# EAGLE board zeta2rework_lw_v19 (EAGLE 9.0.1)
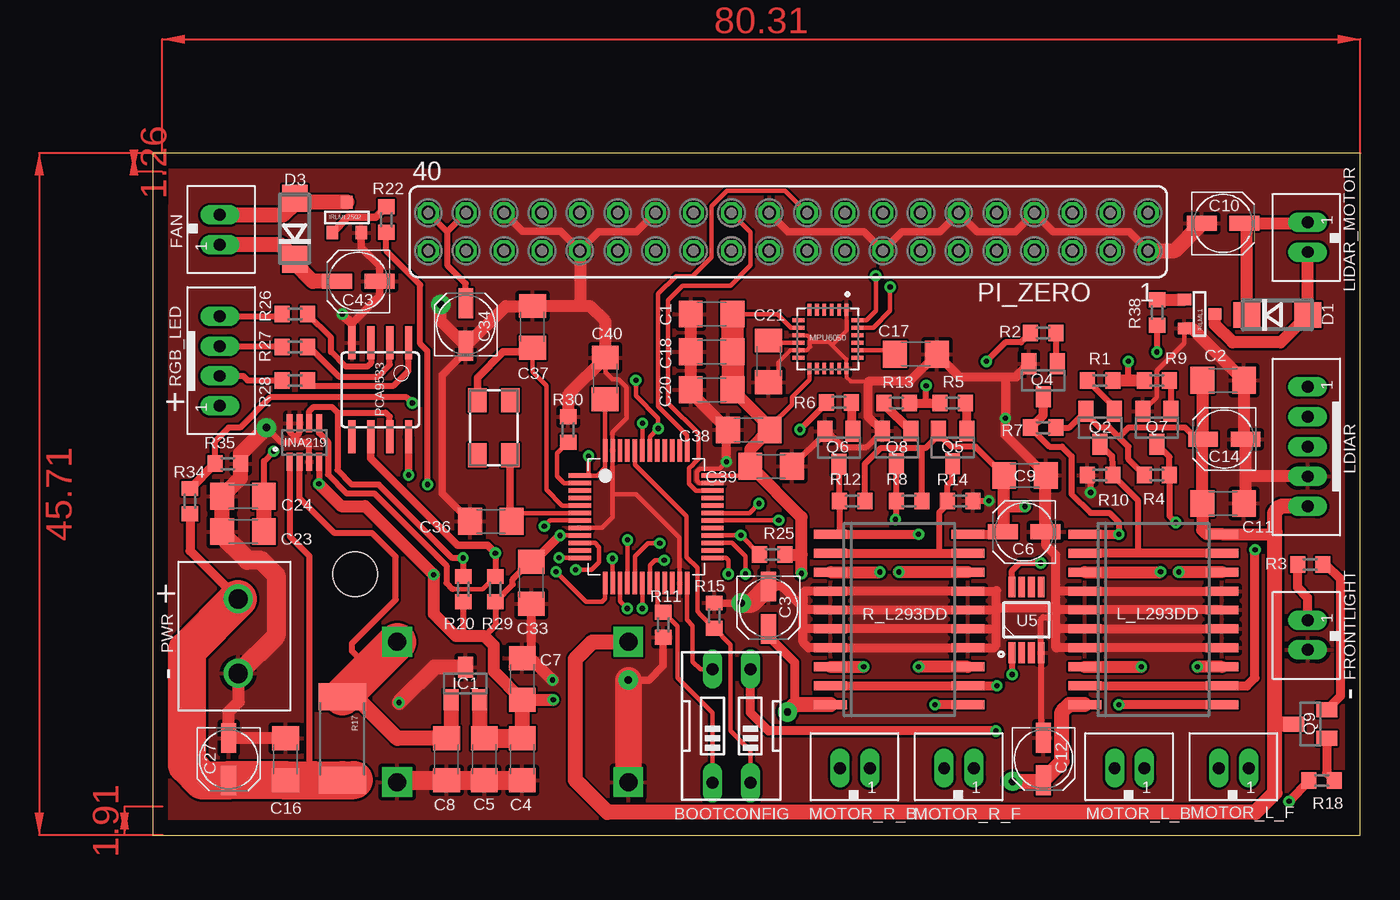
[diagram p0: board, top side]
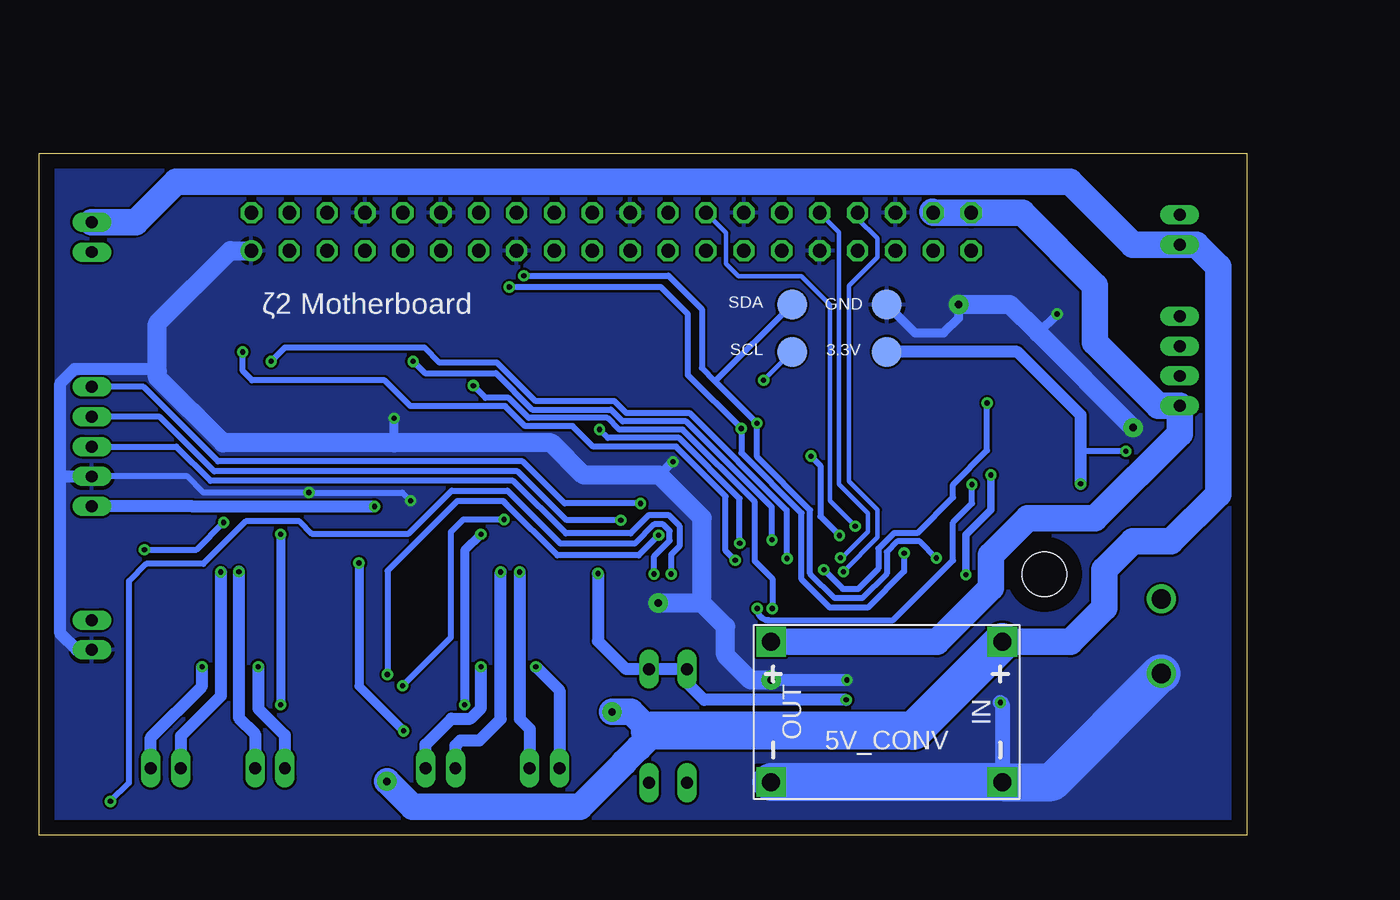
[diagram p1: board, bottom side, seen from below]

Size 80.95 x 45.71 mm. Coordinates in mm from the lower left corner, seen from the top.
Outline: 0,0 80.95,0 80.95,45.71 0,45.71 0,0
Copper layers (1*16): Top 0.035mm / dielectric 1.5mm / Bottom 0.035mm
Design rules "default": minimum track width 6mil, minimum drill 0.35mm, track to track 6mil, track to pad 6mil, pad to pad 6mil, via to via 6mil, smd to smd 6mil, copper to edge 40mil, drill to drill 6mil, minimum pad ring 10mil, minimum via ring 8mil, stop-mask expansion 4mil, vias tented up to drill 0mil, thermal gap 10mil
Holes 3 mm at 13.56,17.48

## Footprints (pad centres in the part's own frame; a part is rotated, then mirrored left to right if it is on the bottom)
TP20R = smd 2 x 2: TP 0,0
DC-DC-STEP-DOWN-MP2307 = drill 1.2 pad 2 square: IN+ -7.747,-4.699; IN- -7.747,4.699; OUT+ 7.747,-4.699; OUT- 7.747,4.699
EDG-02 = drill 0.813 long: 1 -1.27,-3.81; 2 1.27,-3.81; 3 1.27,3.81; 4 -1.27,3.81
C1206 = smd 1.6 x 1.8: 1 -1.4,0; 2 1.4,0
UD-4X5,8_NICHICON = smd 2 x 1: + 1.425,0; - -1.425,0
DO214AC = smd 1.8 x 1.7: A 2.05,0; C -2.05,0
JST_B2B-PH_HEADER = drill 0.8 long: P1 1.075,0.048; P2 -0.925,0.048
SOT23 = smd 1 x 1.4: 1 -0.95,-1.1; 2 0.95,-1.1; 3 0,1.1
SOT23-8 = smd 0.4 x 1.2: 1 -0.975,-1.3; 2 -0.325,-1.3; 3 0.325,-1.3; 4 0.975,-1.3; 5 0.975,1.3; 6 0.325,1.3; 7 -0.325,1.3; 8 -0.975,1.3
SOT-23 = smd 0.787 x 0.889: 1 0.025,-1.016; 2 -0.94,1.016; 3 0.991,1.016
5.0X3.2_KX-9A = smd 1.6 x 1.25: 1 -1.85,-1.1; 2 1.85,-1.1; 3 1.85,1.1; 4 -1.85,1.1
SO20 = smd 0.6 x 2.2: 1 -5.715,-4.6; 2 -4.445,-4.6; 3 -3.175,-4.6; 4 -1.905,-4.6; 5 -0.635,-4.6; 6 0.635,-4.6; 7 1.905,-4.6; 8 3.175,-4.6; 9 4.445,-4.6; 10 5.715,-4.6; 11 5.715,4.6; 12 4.445,4.6; 13 3.175,4.6; 14 1.905,4.6; 15 0.635,4.6; 16 -0.635,4.6; 17 -1.905,4.6; 18 -3.175,4.6; 19 -4.445,4.6; 20 -5.715,4.6
JST_B5B-PH_HEADER = drill 0.8 long: P1 4,0.048; P2 2,0.048; P3 0,0.048; P4 -2,0.048; P5 -4,0.048
QFN50P400X400X95-24N = smd 0.79 x 0.26: 1 -1.97,1.25; 2 -1.97,0.75; 3 -1.97,0.25; 4 -1.97,-0.25; 5 -1.97,-0.75; 6 -1.97,-1.25; 13 1.97,-1.25; 14 1.97,-0.75; 15 1.97,-0.25; 16 1.97,0.25; 17 1.97,0.75; 18 1.97,1.25 | smd 0.26 x 0.79: 7 -1.25,-1.97; 8 -0.75,-1.97; 9 -0.25,-1.97; 10 0.25,-1.97; 11 0.75,-1.97; 12 1.25,-1.97; 19 1.25,1.97; 20 0.75,1.97; 21 0.25,1.97; 22 -0.25,1.97; 23 -0.75,1.97; 24 -1.25,1.97
SOIC8 = smd 0.5 x 2.2: 1 -1.905,-3.154; 2 -0.645,-3.154; 3 0.625,-3.154; 4 1.895,-3.154; 5 1.905,3.154; 6 0.635,3.154; 7 -0.635,3.154; 8 -1.905,3.154
FE20-2 = drill 0.914: 1 -24.13,1.27 | drill 0.914 octagon: 2 -24.13,-1.27; 3 -21.59,1.27; 4 -21.59,-1.27; 5 -19.05,1.27; 6 -19.05,-1.27; 7 -16.51,1.27; 8 -16.51,-1.27; 9 -13.97,1.27; 10 -13.97,-1.27; 11 -11.43,1.27; 12 -11.43,-1.27; 13 -8.89,1.27; 14 -8.89,-1.27; 15 -6.35,1.27; 16 -6.35,-1.27; 17 -3.81,1.27; 18 -3.81,-1.27; 19 -1.27,1.27; 20 -1.27,-1.27; 21 1.27,1.27; 22 1.27,-1.27; 23 3.81,1.27; 24 3.81,-1.27; 25 6.35,1.27; 26 6.35,-1.27; 27 8.89,1.27; 28 8.89,-1.27; 29 11.43,1.27; 30 11.43,-1.27; 31 13.97,1.27; 32 13.97,-1.27; 33 16.51,1.27; 34 16.51,-1.27; 35 19.05,1.27; 36 19.05,-1.27; 37 21.59,1.27; 38 21.59,-1.27; 39 24.13,1.27; 40 24.13,-1.27
691137710002 = drill 1.3: 1 -2.5,0; 2 2.5,0
R0603 = smd 1 x 1.1: 1 -0.85,0; 2 0.85,0
2512 = smd 1.8 x 3.2: 1 -2.8,0; 2 2.8,0
JST_B4B-PH_HEADER = drill 0.8 long: P1 2.98,0.048; P2 0.98,0.048; P3 -1.02,0.048; P4 -3.02,0.048
LQFP48_7X7MM_0.5MMPP = smd 1.5 x 0.3: 1 -4.45,2.75; 2 -4.45,2.25; 3 -4.45,1.75; 4 -4.45,1.25; 5 -4.45,0.75; 6 -4.45,0.25; 7 -4.45,-0.25; 8 -4.45,-0.75; 9 -4.45,-1.25; 10 -4.45,-1.75; 11 -4.45,-2.25; 12 -4.45,-2.75; 25 4.45,-2.75; 26 4.45,-2.25; 27 4.45,-1.75; 28 4.45,-1.25; 29 4.45,-0.75; 30 4.45,-0.25; 31 4.45,0.25; 32 4.45,0.75; 33 4.45,1.25; 34 4.45,1.75; 35 4.45,2.25; 36 4.45,2.75 | smd 0.3 x 1.5: 13 -2.75,-4.45; 14 -2.25,-4.45; 15 -1.75,-4.45; 16 -1.25,-4.45; 17 -0.75,-4.45; 18 -0.25,-4.45; 19 0.25,-4.45; 20 0.75,-4.45; 21 1.25,-4.45; 22 1.75,-4.45; 23 2.25,-4.45; 24 2.75,-4.45; 37 2.75,4.45; 38 2.25,4.45; 39 1.75,4.45; 40 1.25,4.45; 41 0.75,4.45; 42 0.25,4.45; 43 -0.25,4.45; 44 -0.75,4.45; 45 -1.25,4.45; 46 -1.75,4.45; 47 -2.25,4.45; 48 -2.75,4.45
SOP65P490X95-8N = smd 1.4 x 0.45: 1 -2.2,0.975; 2 -2.2,0.325; 3 -2.2,-0.325; 4 -2.2,-0.975; 5 2.2,-0.975; 6 2.2,-0.325; 7 2.2,0.325; 8 2.2,0.975

## Placement (x,y rotation side)
3.3V  TPSQTP20R  [TP20R]  24.13,32.38 0 bottom
5V_CONV  DC-DC-STEP-DOWN-MP2307  [DC-DC-STEP-DOWN-MP2307]  24.13,8.25 180 bottom
BOOTCONFIG  [EDG-02]  38.79,7.32 0 top
C1  10µF  [C1206]  37.46,34.92 180 top
C2  0.1nF  [C1206]  71.76,30.48 0 top
C3  47µF  [UD-4X5,8_NICHICON]  41.27,15.24 270 top
C4  10µF  [C1206]  24.77,5.08 270 top
C5  0.1µF  [C1206]  22.23,5.08 270 top
C6  10µF  [UD-4X5,8_NICHICON]  58.42,20.32 180 top
C7  0.1µF  [C1206]  24.77,10.46 90 top
C8  4.7µF  [C1206]  19.69,5.08 270 top
C9  0.1nF  [C1206]  58.47,24.1 0 top
C10  47µF  [UD-4X5,8_NICHICON]  71.76,41 0 top
C11  0.1µF  [C1206]  71.76,22.23 0 top
C12  47µF  [UD-4X5,8_NICHICON]  59.72,5.11 270 top
C14  10µF  [UD-4X5,8_NICHICON]  71.83,26.54 180 top
C16  0.1µF  [C1206]  8.89,5.08 90 top
C17  2,2nF  [C1206]  51.16,32.23 0 top
C18  0.1µF  [C1206]  37.46,32.38 180 top
C20  0.1µF  [C1206]  37.46,29.84 180 top
C21  0.1µF  [C1206]  41.27,31.75 270 top
C23  10µF  [C1206]  6.05,20.35 180 top
C24  0.1µF  [C1206]  6.05,22.71 180 top
C27  47µF  [UD-4X5,8_NICHICON]  5.08,5.08 270 top
C33  10nF  [C1206]  25.37,16.92 270 top
C34  47µF  [UD-4X5,8_NICHICON]  20.98,34.21 90 top
C36  10µF  [C1206]  22.66,21.03 0 top
C37  10µF  [C1206]  25.45,34.06 270 top
C38  10nF  [C1206]  39.95,27.15 180 top
C39  10nF  [C1206]  41.45,24.71 0 top
C40  10nF  [C1206]  30.33,30.61 89.8 top
C43  47µF  [UD-4X5,8_NICHICON]  13.77,37.11 180 top
D1  1N4004 SMD  [DO214AC]  75.39,34.85 0 top
D3  1N4004 SMD  [DO214AC]  9.53,40.64 90 top
FAN  JST-PH_2-PIN_HEADER  [JST_B2B-PH_HEADER]  4.45,40.64 270 top
FRONTLIGHT  JST-PH_2-PIN_HEADER  [JST_B2B-PH_HEADER]  77.47,13.34 90 top
GND  TPSQTP20R  [TP20R]  24.13,35.56 0 bottom
IC1  MAX6520  [SOT23]  20.96,10.16 0 top
INA219  INA219  [SOT23-8]  10.16,26.31 0 top
IRLML1  [SOT-23]  70.18,34.9 90 top
IRLML2502  [SOT-23]  13.03,41.4 180 top
KX-9A  8Mhz  [5.0X3.2_KX-9A]  22.86,27.3 90 top
L_L293DD  L293DD  [SO20]  67.08,14.45 270 top
LDIAR  JST-PH_5-PIN_HEADER  [JST_B5B-PH_HEADER]  77.47,26.04 90 top
LIDAR_MOTOR  JST-PH_2-PIN_HEADER  [JST_B2B-PH_HEADER]  77.47,40.01 90 top
MOTOR_L_B  JST-PH_2-PIN_HEADER  [JST_B2B-PH_HEADER]  65.41,4.44 0 top
MOTOR_L_F  JST-PH_2-PIN_HEADER  [JST_B2B-PH_HEADER]  72.39,4.44 0 top
MOTOR_R_B  JST-PH_2-PIN_HEADER  [JST_B2B-PH_HEADER]  46.99,4.44 0 top
MOTOR_R_F  JST-PH_2-PIN_HEADER  [JST_B2B-PH_HEADER]  53.98,4.44 0 top
MPU6050  MPU-6050  [QFN50P400X400X95-24N]  45.26,33.25 270 top
PCA9533  PCA9533  [SOIC8]  15.24,29.84 180 top
PI_ZERO  [FE20-2]  42.6,40.44 180 top
PWR  691137710002  [691137710002]  5.71,13.34 270 top
Q2  [SOT23]  63.5,27.3 180 top
Q4  [SOT23]  59.69,30.48 180 top
Q5  [SOT23]  53.62,25.98 180 top
Q6  [SOT23]  46,25.96 180 top
Q7  [SOT23]  67.31,27.3 180 top
Q8  [SOT23]  49.86,25.98 180 top
Q9  [SOT23]  77.6,7.44 90 top
R1  500R  [R0603]  63.5,30.48 180 top
R2  500R  [R0603]  59.69,33.66 0 top
R3  220R  [R0603]  77.6,18.14 180 top
R4  100k  [R0603]  67.31,24.13 180 top
R5  500R  [R0603]  53.62,28.96 0 top
R6  500R  [R0603]  46,29.01 0 top
R7  100k  [R0603]  59.69,27.3 0 top
R8  100k  [R0603]  50.7,22.4 0 top
R9  500R  [R0603]  67.31,30.48 0 top
R10  100k  [R0603]  63.5,24.13 0 top
R11  132k  [R0603]  34.21,14.1 90 top
R12  100k  [R0603]  46.89,22.4 0 top
R13  500R  [R0603]  49.86,28.96 180 top
R14  100k  [R0603]  54.13,22.4 180 top
R15  132k  [R0603]  37.64,14.71 270 top
R17  0.1/1% (PT2512FK-070R1L)  [2512]  12.7,6.48 270 top
R18  500  [R0603]  78.36,3.66 0 top
R20  10k  [R0603]  20.8,16.48 90 top
R22  22R  [R0603]  15.65,41.25 90 top
R25  4k7  [R0603]  41.53,18.8 0 top
R26  220R  [R0603]  9.53,34.92 180 top
R27  220R  [R0603]  9.53,32.72 180 top
R28  220R  [R0603]  9.53,30.48 180 top
R29  10k  [R0603]  22.96,16.48 90 top
R30  100k  [R0603]  27.84,27.18 90 top
R34  100k  [R0603]  2.49,22.38 270 top
R35  69k  [R0603]  5.03,24.89 180 top
R38  22R  [R0603]  67.34,35.03 90 top
R_L293DD  L293DD  [SO20]  50.04,14.45 270 top
RGB_LED  JST-PH_4-PIN_HEADER  [JST_B4B-PH_HEADER]  4.45,31.75 270 top
SCL  TPSQTP20R  [TP20R]  30.48,32.38 0 bottom
SDA  TPSQTP20R  [TP20R]  30.48,35.56 0 bottom
STM32F103CB  STM32F103CB  [LQFP48_7X7MM_0.5MMPP]  33.07,21.34 0 top
U5  DS18B20U+  [SOP65P490X95-8N]  58.57,14.43 90 top

## Library data of the parts
3.3V GND SCL SDA = testpad
5V_CONV = diy-modules
BOOTCONFIG = special
C1-C12 C14 C16-C18 C20 C21 C23 C24 C27 C33 C34 C36-C40 C43 = rcl; SPICEPREFIX: C
D1 D3 = diode
FAN FRONTLIGHT LDIAR LIDAR_MOTOR MOTOR_L_B MOTOR_L_F MOTOR_R_B MOTOR_R_F RGB_LED = srg
IC1 = maxim; MF: MAXIM; MPN: MAX6520EUR-T; OC_FARNELL: unknown; OC_NEWARK: 02J4586
INA219 = INA219; AVAILABILITY: Unavailable; DESCRIPTION: the ina219 is a high-side current shunt and power monitor with an i2c interface. the ina219 monitors both shunt drop ...; MF: Texas Instruments; MP: INA219; PACKAGE: None; PRICE: None
IRLML1 IRLML2502 = zetex; OC_FARNELL: unknown; OC_NEWARK: unknown
KX-9A = crystal-geyer_V1_0
L_L293DD R_L293DD = st-microelectronics; OC_FARNELL: unknown
MPU6050 = MPU-6050; AVAILABILITY: Good; DESCRIPTION: 3-axis gyroscope, 3-axis accelerometer in a 4x4x0.9 housing; MF: TDK; MP: MPU-6050; PACKAGE: QFN-24 InvenSense; PRICE: 5.12 USD
PCA9533 = adam - ics
PI_ZERO = con-lsta; OC_FARNELL: unknown; OC_NEWARK: unknown
PWR = term block; AVAILABILITY: Unavailable; DESCRIPTION: Term Block 2pos Side Entry 5mm; MF: Wurth Electronics; MP: 691137710002; PACKAGE: None; PRICE: None
Q2 Q4-Q9 = semicon-smd-ipc
R1-R15 R18 R20 R22 R25-R30 R34 R35 R38 = rcl; SPICEPREFIX: R
R17 = microbuilder
STM32F103CB = STM32F103C8T6; AVAILABILITY: Good; DESCRIPTION: Mainstream Performance line, ARM Cortex-M3 MCU with 64 Kbytes Flash, 72 MHz CPU, motor control, USB and CAN; MF: STMicroelectronics; MP: STM32F103C8T6; PACKAGE: LQFP-48 STMicroelectronics; PRICE: 3.83 USD
U5 = DS18B20U_; AVAILABILITY: Unavailable; DESCRIPTION: Date Code: 1043+; RoHS Compliant: Yes;; MF: Maxim; MP: DS18B20U+; PACKAGE: TSSOP-8 Chip Coolers; PRICE: None

## Nets
+3V3: 3.3V.TP BOOTCONFIG.3 BOOTCONFIG.4 C1.1 C4.1 C5.1 C7.1 C18.1 C20.1 C23.1 C24.1 C33.1 C38.1 C39.1 C40.1 IC1.2 INA219.4 MPU6050.8 MPU6050.13 PCA9533.8 R20.1 R25.2 R29.1 STM32F103CB.1 STM32F103CB.9 STM32F103CB.24 STM32F103CB.36 STM32F103CB.48 U5.8
+5V: 5V_CONV.OUT+ C2.1 C6.+ C9.1 C11.1 C14.+ C34.+ L_L293DD.20 LDIAR.P5 PI_ZERO.38 PI_ZERO.40 Q2.2 Q5.2 Q9.3 R4.2 R7.2 R8.2 R12.2 R_L293DD.20 RGB_LED.P1
+8V: 5V_CONV.IN+ C3.+ C8.1 C10.+ C12.+ C43.+ D1.C D3.C FAN.P1 IC1.1 INA219.2 L_L293DD.10 LIDAR_MOTOR.P1 R17.1 R_L293DD.10
BAT_LVL: R34.1 R35.2 STM32F103CB.10
BOOT0: BOOTCONFIG.2 R15.2 STM32F103CB.44
BOOT1: BOOTCONFIG.1 R11.2 STM32F103CB.20
BOOT2: PI_ZERO.29
BOOT3: PI_ZERO.27
FRONT_LIGHT: R18.1 STM32F103CB.27
GND: 5V_CONV.IN- 5V_CONV.OUT- C1.2 C2.2 C3.- C4.2 C5.2 C6.- C7.2 C8.2 C9.2 C10.- C11.2 C12.- C14.- C16.2 C17.2 C18.2 C20.2 C21.2 C23.2 C24.2 C27.- C33.2 C34.- C36.1 C37.1 C38.2 C39.2 C40.2 C43.- FRONTLIGHT.P2 GND.TP IC1.3 INA219.3 INA219.7 INA219.8 IRLML1.2 IRLML2502.2 L_L293DD.4 L_L293DD.5 L_L293DD.6 L_L293DD.7 L_L293DD.14 L_L293DD.15 L_L293DD.16 L_L293DD.17 LDIAR.P4 MPU6050.1 MPU6050.9 MPU6050.11 MPU6050.18 PCA9533.4 PI_ZERO.1 PI_ZERO.8 PI_ZERO.12 PI_ZERO.15 PI_ZERO.22 PI_ZERO.28 PI_ZERO.31 PI_ZERO.36 PWR.2 Q4.2 Q6.2 Q7.2 Q8.2 R10.1 R11.1 R14.1 R15.1 R30.2 R35.1 R_L293DD.4 R_L293DD.5 R_L293DD.6 R_L293DD.7 R_L293DD.14 R_L293DD.15 R_L293DD.16 R_L293DD.17 STM32F103CB.8 STM32F103CB.23 STM32F103CB.35 STM32F103CB.47 U5.4
LIDAR_POS_INT: LDIAR.P3 STM32F103CB.25
M_DIR_1: R1.1 R9.1 STM32F103CB.14
M_DIR_2: R5.1 R13.1 STM32F103CB.15
MPU_INT: MPU6050.12
N$1: L_L293DD.9 L_L293DD.12 Q7.3 R4.1
N$2: MOTOR_R_F.P2 R_L293DD.18
N$3: MOTOR_R_F.P1 R_L293DD.13
N$4: L_L293DD.18 MOTOR_L_F.P2
N$5: L_L293DD.2 L_L293DD.19 Q2.3 R10.2
N$6: Q8.3 R8.1 R_L293DD.9 R_L293DD.12
N$7: Q5.3 R14.2 R_L293DD.2 R_L293DD.19
N$8: L_L293DD.1 L_L293DD.11 Q4.3 R7.1
N$9: Q6.3 R12.1 R_L293DD.1 R_L293DD.11
N$10: Q2.1 R1.2
N$11: Q4.1 R2.2
N$12: Q7.1 R9.2
N$13: Q5.1 R5.2
N$14: Q6.1 R6.2
N$15: Q8.1 R13.2
N$16: L_L293DD.13 MOTOR_L_F.P1
N$17: L_L293DD.8 MOTOR_L_B.P2
N$18: L_L293DD.3 MOTOR_L_B.P1
N$19: Q9.1 R18.2
N$20: Q9.2 R3.1
N$21: FRONTLIGHT.P1 R3.2
N$22: PCA9533.3 R26.1
N$23: PCA9533.2 R27.1
N$24: PCA9533.1 R28.1
N$25: MOTOR_R_B.P2 R_L293DD.8
N$26: MOTOR_R_B.P1 R_L293DD.3
N$31: R26.2 RGB_LED.P4
N$33: R27.2 RGB_LED.P3
N$34: C17.1 MPU6050.20
N$35: R28.2 RGB_LED.P2
N$36: C21.1 MPU6050.10
N$37: IRLML2502.3 R22.2
N$38: IRLML1.3 R38.2
N$39: D1.A IRLML1.1 LIDAR_MOTOR.P2
N$46: C36.2 KX-9A.1 STM32F103CB.6
N$47: C37.2 KX-9A.3 STM32F103CB.5
N$49: R30.1 STM32F103CB.2
N$55: D3.A FAN.P2 IRLML2502.1
NRST: PI_ZERO.26 STM32F103CB.7
PWM_FAN: R22.1 STM32F103CB.18
PWM_LIDAR: R38.1 STM32F103CB.19
PWM_M_EN_1: R2.1 STM32F103CB.16
PWM_M_EN_2: R6.1 STM32F103CB.17
SCL: INA219.5 MPU6050.23 PCA9533.6 R29.2 SCL.TP STM32F103CB.42
SDA: INA219.6 MPU6050.24 PCA9533.7 R20.2 SDA.TP STM32F103CB.43
SWCLK: PI_ZERO.20 STM32F103CB.37
SWDIO: PI_ZERO.24 STM32F103CB.34
TEMPERATURE: R25.1 STM32F103CB.28 U5.1
U1_RX: LDIAR.P1 STM32F103CB.31
U1_TX: LDIAR.P2 STM32F103CB.30
USART2_RX: PI_ZERO.34 STM32F103CB.13
USART2_TX: PI_ZERO.32 STM32F103CB.12
USB_DM: STM32F103CB.32
USB_DP: STM32F103CB.33
V+: C16.1 C27.+ INA219.1 PWR.1 R17.2 R34.2

## Tracks (layer width: path | path; a pad name or v marks a point on that pad's centre or on a via)
+3V3  (via drill 0.35)
  Top 0.305: MPU6050.8 42.79,34 41.86,34.92 C1.1 | STM32F103CB.1 29.21,24.09 | 29.21,24.09 29.8,24.09 30.32,24.61 STM32F103CB.48 C40.1 | STM32F103CB.36 39.42,24.09 C39.1 | MPU6050.13 44.01,30.52 42.85,29.36 42.85,28.85 41.35,27.36 C38.1 | STM32F103CB.9 v27.31,20.09 | v29.21,25.4 29.21,24.09 | STM32F103CB.24 35.82,14.42 36.2,14.05 36.2,11.63 36.7,11.12 BOOTCONFIG.4
  Top 0.406: U5.8 57.6,17.72 58.11,18.24 v59.51,18.24 | 25.13,17.84 C33.1 | 25.76,18.32 C33.1 | R20.1 20.8,13.49 20.96,13.34 | 22.23,13.34 22.96,14.07 R29.1 24.13,16.8 24.13,17.14 25.3,18.32 C33.1 | 25.43,18.32 C33.1 | 27.14,20.09 v27.31,20.09 | INA219.4 11.13,23.56 v11.12,23.55 | C24.1 7.44,25.07 v8.1,25.73
  Top 0.508: PCA9533.8 v17.15,24.13 | 11.13,23.48 11.13,23.56
  Top 0.61: BOOTCONFIG.3 40.06,8.2 41.27,6.99 v56.52,6.99 | v27.31,20.09 25.54,18.32 C33.1
  Top 0.813: C7.1 24.36,8.66 | C7.1 22.86,10.97 22.86,12.7 22.23,13.34 20.96,13.34 20.32,13.34 18.82,14.83 v18.82,17.45 14.22,22.05 12.62,22.05 v11.12,23.55 | C20.1 41.35,27.36 C38.1 40.05,25.85 C39.1 40.09,24.71 43.48,21.32 43.48,18.8 | v43.48,17.53 43.48,18.8 | R25.2 43.48,18.8 | C7.1 v26.85,9.07
  Top 1.016: IC1.2 21.91,6.8 C5.1 | C7.1 C4.1 | C23.1 C24.1
  Top 1.27: C5.1 C4.1
  Top 1.524: C20.1 38.89,30.96 C18.1 C1.1
  Bottom 0.406: v27.31,20.09 28.58,21.36 28.58,24.77 v29.21,25.4 | v8.1,25.73 10.82,25.73 11.12,26.04
  Bottom 0.508: v17.15,24.13 17.15,21.79 18.82,20.12 v18.82,17.45 | v11.12,23.55 11.15,23.57
  Bottom 0.61: v59.51,18.24 59.51,9.98 v56.52,6.99 | BOOTCONFIG.4 37.52,11.23
  Bottom 0.813: v43.48,17.53 43.48,13 41.6,11.12 BOOTCONFIG.3 BOOTCONFIG.4 37.52,10.21 36.37,9.07 v26.85,9.07 | 3.3V.TP 15.37,32.38 11.12,28.14 11.12,26.04 v11.12,23.55
+5V  (via drill 0.35)
  Top 0.305: 52.67,26.81 52.67,26.88
  Top 0.406: R12.2 47.74,24.88 48.82,25.96 51.43,25.96 | 52.67,26.81 51.82,25.96 51.43,25.96 | R8.2 51.55,25.84 51.43,25.96 | 18.47,41.61 PI_ZERO.40 19.74,40.44 | R4.2 65.41,25.19 65.41,26.04 64.77,26.67 | 64.77,26.67 64.14,27.3 63.5,27.3 62.55,28.26 Q2.2 61.45,27.3 R7.2 | 64.77,26.67 65.41,27.3 69.22,27.3 69.98,26.54 C14.+ | Q5.2 52.67,26.88 53.52,26.03 55.15,26.03 C9.1 | C34.+ 20.98,36.96 19.74,38.2 19.74,40.44 | PI_ZERO.38 19.74,40.44
  Top 0.61: R_L293DD.20 56.84,20.17 C6.+
  Top 0.813: C6.+ 57.07,20.4 57.07,22.23 | 57.07,22.23 C9.1 | C2.1 70.41,30.43 C14.+ 70.36,26.49 C11.1 70.36,20.45 70.64,20.17 L_L293DD.20 75.08,20.17 75.23,20.32 | v58.47,22.02 57.27,22.02 57.07,22.23
  Top 1.016: LDIAR.P5 75.6,22.04 75.23,21.66 75.23,20.32 75.23,7.62 | 5V_CONV.OUT+ 29.46,12.95 28.32,11.81 28.32,3.68 30.48,1.52 73.91,1.52 75.23,2.84 75.23,7.62 | Q9.3 75.41,7.44 75.23,7.62
  Bottom 0.813: v58.48,22.04 v58.47,22.02 70.66,22.02 70.68,22.04 LDIAR.P5
  Bottom 1.778: 21.08,41.78 PI_ZERO.38 PI_ZERO.40 15.04,41.71 10.16,36.83 10.16,33.02 5.91,28.77 RGB_LED.P1 4.49,26.9 10.16,21.23 14.67,21.23 17.15,18.76 17.15,16.59 20.78,12.95 5V_CONV.OUT+
+8V  (via drill 0.5 pad 1.3)
  Top 0.406: R17.1 12.31,8.89 11.43,8.89 11.48,8.94 | INA219.2 9.83,22.58 12.17,20.25 14.69,20.25 16.28,18.65 16.28,15.78 13.33,12.83 13.33,12.34 14.09,11.59 14.09,10.67
  Top 0.61: C3.+ 41.27,13.34 43.03,11.58 43.03,8.74
  Top 0.813: LIDAR_MOTOR.P1 77.34,41 C10.+ 73.34,40.84 D1.C
  Top 1.016: C43.+ 10.73,37.11 9.53,38.31 D3.C 8.58,39.56 FAN.P1 | IC1.1 20.01,6.8 C8.1 16.38,6.48 13.58,9.28 R17.1 | 59.71,3.2 C12.+ | v57.63,3.61 59.64,3.61 C12.+ | R_L293DD.10 43.03,8.74 v42.54,8.25 | L_L293DD.10 61.44,8.74 60.96,8.25 60.96,4.92 C12.+
  Top 2.54: R17.1 14.09,10.67 5V_CONV.IN+
  Bottom 1.778: v42.54,8.25 41.27,8.25 40,6.99 40,6.6 40.74,5.87 40.76,5.87 41.76,4.87 41.76,4.85 44.7,1.91 55.93,1.91 v57.63,3.61 | LIDAR_MOTOR.P1 74.49,41.08 71.77,43.8 11.86,43.8 7.62,39.56 FAN.P1 3.37,39.56 1.91,38.1 1.91,22.86 5.08,19.69 7.62,19.69 9.53,17.78 9.53,15.24 11.81,12.95 5V_CONV.IN+
  Bottom 2.54: 5V_CONV.IN+ 22.35,6.99 40,6.99
BAT_LVL  (via drill 0.35)
  Top 0.305: STM32F103CB.10 29.64,19.59 29.92,19.3 29.92,18.29 29.41,17.78 v28.35,17.78
  Top 0.406: v17.4,28.96 17.02,29.34 7.87,29.34 5.84,27.3 5.08,27.3 4.15,26.38 4.15,24.89
  Top 0.61: R34.1 4.15,24.89 R35.2
  Bottom 0.406: v28.35,17.78 27.08,16.51 26.04,16.51 24.69,17.86 24.69,19.2 23.64,20.24 22.07,20.24 19.69,22.63 19.69,23.5 17.4,25.78 v17.4,28.96
BOOT0
  Top 0.305: STM32F103CB.44 32.32,24.83 34.47,22.68 34.48,22.68 35.78,21.38 35.78,18.63 36.5,17.91 36.5,16.89 36.5,16.51 36.5,15 36.73,14.77 36.86,14.64 R15.2 38.73,12.76 38.73,6.99 40.06,5.66 BOOTCONFIG.2
BOOT1
  Top 0.305: 37.52,4.02 BOOTCONFIG.1 37.52,8.2 35.18,10.54 35.18,12.7 35.18,12.83 35.18,13.98 R11.2 33.82,14.71 STM32F103CB.20
FRONT_LIGHT  (via drill 0.35)
  Top 0.305: v39.73,17.5 39.73,18.69 38.83,19.59 STM32F103CB.27
  Top 0.61: R18.1 77.51,3.59 v76.18,2.26
  Bottom 0.406: v39.73,17.5 39.73,18.69 38.69,19.73 38.69,20.39 39.12,20.82 39.73,20.82 41.02,19.53 46,19.53 49.55,23.09 53.29,23.09 56.17,20.21 62.67,20.21 63.5,21.03 67.11,21.03 69.95,18.19 73.76,18.19 74.93,17.02 74.93,3.5 v76.18,2.26
GND  (via drill 0.35, 0.5 pad 1.3)
  Top 0.254: MPU6050.9 43.87,33.5 44.07,33.3 44.07,33.02 | 44.07,33.02 44.07,32.72 43.85,32.5 MPU6050.11 42.73,32.5 41.91,31.67 41.91,30.48 41.78,30.35 C21.2 | 47.98,30.4 46.79,30.4 46.51,30.68 MPU6050.18 46.51,31.87 45.54,32.84 | 50.73,30.4 50.8,30.48 | 44.07,33.02 45.36,33.02 45.54,32.84 | MPU6050.1 46.51,33.81 45.54,32.84
  Top 0.305: Q7.2 67.31,29.36 67.31,31.12 69.16,32.97 IRLML1.2 | 30.82,22.86 STM32F103CB.47 30.82,27.01 31.75,27.94 31.75,30.02 31.22,30.56 30.81,30.56 30.33,31.03 C40.2 | STM32F103CB.23 35.32,19.92 32.38,22.86 30.82,22.86 | STM32F103CB.8 30.11,20.59 30.82,21.3 30.82,22.86 | STM32F103CB.35 36.66,23.59 36.47,23.78 36.47,24.36 36.67,24.56 38,24.56 v38.46,25.02
  Top 0.406: Q8.2 47.83,26 46.3,26 45.25,27.06 Q6.2 45.05,26.91 C39.2 | INA219.8 9.19,27.01 9.53,26.67 | 9.53,26.67 9.83,26.98 INA219.7 | 7.56,27.24 v7.62,27.3 | R10.1 62.86,23.91 v62.86,22.96 | R14.1 v56.06,22.4 | 59.55,6.7 U5.4 59.55,14.46 59.69,14.61 60.53,14.61 | 9.53,26.67 9.2,26.34 8.59,26.34 v7.62,27.3 | 9.53,26.67 9.88,26.31 10.39,26.31 10.48,26.22 INA219.3 | 7.62,27.13 v7.62,27.3
  Top 0.508: PI_ZERO.1 65.46,40.44 60.38,40.44 PI_ZERO.8 57.84,40.44 55.3,40.44 PI_ZERO.12 52.76,40.44 50.22,40.44 PI_ZERO.15 47.68,40.44 42.6,40.44 PI_ZERO.22 | PI_ZERO.28 32.44,40.44 29.9,40.44 PI_ZERO.31 27.33,40.46 24.79,40.46 PI_ZERO.36 | C36.1 19.38,22.91 19.38,30.81 20.98,32.41 C34.- | IRLML2502.2 13.97,39.37 15.19,38.15 C43.- 15.19,36.15 13.35,34.3 PCA9533.4 13.35,34.28 | 59.55,6.7 C12.- | R11.1 34.21,11.35 33.25,10.39 v31.88,10.39 | R15.1 v39.45,15.55 | 7.81,26.99 7.56,27.24
  Top 0.61: 57.15,30.71 v57.15,27.94 57.15,26.83 C9.2 | 50.8,30.48 C17.2 54.08,30.71 57.15,30.71 | 50.73,30.4 47.98,30.4 47.95,30.38 47.95,28.04 Q8.2 | v38.46,25.02 38.46,27.05 C38.2 | C7.2 25.38,12.47 C33.2 | C6.- 59.84,19.45 60.53,18.77 60.53,16.51 | 57.15,30.71 57.87,30.71 Q4.2 | L_L293DD.17 L_L293DD.4 60.68,16.36 60.53,16.51 | L_L293DD.16 L_L293DD.5 60.68,15.09 60.53,15.24 | L_L293DD.15 L_L293DD.6 60.68,13.82 60.53,13.97 | L_L293DD.14 L_L293DD.7 60.6,12.55 60.53,12.62 60.53,13.97 | v12.7,34.92 13.32,34.3 13.35,34.3 | 60.53,13.97 60.53,14.61 60.53,15.24 | 60.53,15.24 60.53,16.51 | 56.52,15.24 56.52,13.97 | 56.52,13.97 56.52,12.7 56.36,12.55 R_L293DD.14 R_L293DD.7 43.97,12.55 43.59,12.93 43.59,13.97 | 56.52,15.24 56.36,15.09 R_L293DD.16 R_L293DD.5 43.74,15.09 43.59,15.24 | 56.52,13.97 56.36,13.82 R_L293DD.15 R_L293DD.6 43.74,13.82 43.59,13.97 | 56.52,15.24 60.53,15.24 | 43.59,13.97 43.59,15.24 | 43.59,15.24 42.16,16.66 C3.- | 43.59,15.24 43.59,16.21 43.74,16.36 R_L293DD.4 R_L293DD.17 56.52,16.36 | 56.57,16.41 56.52,16.36 | 56.52,16.36 56.52,15.24
  Top 0.813: 73.26,24.13 C14.- 73.16,26.64 C2.2 69.68,33.96 IRLML1.2 | 73.26,24.13 73.26,22.33 C11.2 | LDIAR.P4 73.35,24.04 73.26,24.13 | C1.2 C18.2 C20.2 36.06,29.64 C38.2 | C6.- 59.84,24.08 C9.2 | R30.2 27.84,29.51 C40.2 30.33,34.44 29.31,35.46 28.58,35.46 | 28.58,35.46 C37.1 23.65,35.46 C34.- 19.3,34.47 v19.3,35.56 | PI_ZERO.31 28.63,35.51 28.58,35.46 | C7.2 25.32,11.87 v26.8,10.39 | 4.59,22.66 C24.2 | 5.75,10.84 5.75,8.93 5.08,8.25 C27.- 5.1,6.48 C16.2
  Top 1.016: PI_ZERO.1 68.5,39.17 C10.- | IC1.3 18.88,11.26 v16.51,8.89 | C23.2 C24.2 5.88,23.94 R35.1 5.88,25.56 v7.62,27.3
  Top 1.27: v39.45,15.55 40.16,15.55 C3.- | 5V_CONV.IN- 16.51,3.68 C8.2 C5.2 C4.2 | C23.2 4.59,20.17 6.35,18.41 7.26,18.41 8.26,17.42 8.26,13.34 5.75,10.84 PWR.2
  Top 1.778: 5V_CONV.OUT- v31.88,10.39
  Bottom 0.406: LDIAR.P4 71.03,24.04 69.95,22.96 v62.86,22.96 56.61,22.96 v56.06,22.4
  Bottom 0.61: 57.15,26.29 v57.15,27.94 | v38.46,25.02 38.48,25.02 39.37,24.13 | GND.TP 22.23,33.66 20.32,33.66 19.3,34.67 v19.3,35.56 | v12.7,34.92 13.97,33.66
  Bottom 0.813: v26.8,10.39 v31.88,10.39 | 73.03,31.12 73.16,31.25 78.58,31.25 79.53,30.3 79.53,24.13 | FRONTLIGHT.P2 78.45,12.41 79.53,13.49 79.53,24.13 | 79.53,24.13 79.43,24.04 LDIAR.P4
  Bottom 1.016: v16.51,8.89 16.38,8.76 5V_CONV.IN-
  Bottom 1.27: 36.5,15.55 v39.45,15.55 | v31.88,10.39 33.25,10.39 34.92,12.07 34.92,13.97 36.5,15.55 | 36.5,15.55 36.5,21.26 39.37,24.13 44.45,24.13 46.61,26.29 57.15,26.29 68.63,26.29 73.03,30.68 73.03,31.12 73.03,34.29 68.15,39.17 PI_ZERO.1 | v7.62,27.3 13.97,33.66 15.88,35.56 v19.3,35.56
  Bottom 2.54: 5V_CONV.OUT- 5V_CONV.IN- 13.06,3.56 5.78,10.84 PWR.2
  pour Top: -0.64,46.99 -0.64,-1.27 82.55,-1.27 82.55,46.99
  pour Bottom: 0,46.36 0,-0.64 81.92,-0.64 81.92,46.36
LIDAR_POS_INT  (via drill 0.35)
  Top 0.305: STM32F103CB.25 38.44,18.59 38.61,18.41 38.61,17.53 v38.58,17.5
  Bottom 0.406: v38.58,17.5 38.58,18.8 38.02,19.36 38.02,20.73 38.76,21.46 40.06,21.46 41.3,20.22 45.64,20.22 49.17,23.75 69.47,23.75 71.76,26.04 LDIAR.P3
M_DIR_1  (via drill 0.35)
  Top 0.305: STM32F103CB.14 30.82,18.53 v30.81,18.54
  Top 0.406: 65.41,30.48 v65.41,31.75
  Top 0.813: R1.1 65.41,30.48 R9.1
  Bottom 0.406: v30.81,18.54 30.84,18.57 30.84,21.78 37.35,28.3 41.6,28.3 42.39,29.08 47.67,29.08 50.26,31.67 54.13,31.67 55.12,32.66 64.49,32.66 v65.41,31.75
M_DIR_2  (via drill 0.35)
  Top 0.305: STM32F103CB.15 31.32,15.67 v31.8,15.19
  Top 0.406: 52.07,28.96 51.84,29.19 v51.84,30.12
  Top 0.61: R13.1 52.07,28.96 R5.1
  Bottom 0.406: v31.8,15.19 31.8,17.2 32.97,18.36 32.97,22.33 37.82,27.18 42.06,27.18 42.85,27.97 48.13,27.97 49.48,29.31 51.03,29.31 v51.84,30.12
N$1  (via drill 0.35)
  Top 0.406: Q7.3 68.16,25.36 R4.1 68.16,21.38 v68.58,20.96
  Top 0.61: L_L293DD.9 L_L293DD.12 73.36,10.01 73.89,10.54 v73.89,19.13
  Bottom 0.406: v73.89,19.13 70.41,19.13 v68.58,20.96
N$2  (via drill 0.35)
  Top 0.813: R_L293DD.18 v50.01,17.63
  Bottom 0.813: v50.01,17.63 50.01,7.77 51.43,6.35 52.7,6.35 53.05,6 MOTOR_R_F.P2
N$3  (via drill 0.35)
  Top 0.813: R_L293DD.13 v51.33,11.28
  Bottom 0.813: MOTOR_R_F.P1 55.05,6.06 53.31,7.8 52.04,7.8 51.33,8.5 v51.33,11.28
N$4  (via drill 0.35)
  Top 0.813: L_L293DD.18 v68.78,17.63
  Bottom 0.813: v68.78,17.63 68.78,9.32 71.47,6.64 MOTOR_L_F.P2
N$5
  Top 0.406: Q2.3 64.3,25.41 R10.2 66.04,22.44 66.04,18.9
  Top 0.61: L_L293DD.19 67.95,18.9 66.04,18.9 L_L293DD.2
N$6  (via drill 0.35)
  Top 0.406: Q8.3 49.85,24.87 R8.1 49.85,21.22 v49.78,21.16
  Top 0.61: R_L293DD.9 R_L293DD.12 v56.59,10.01
  Bottom 0.406: v56.59,10.01 53.34,13.26 53.34,20.32 52.5,21.16 v49.78,21.16
N$7
  Top 0.406: R14.2 53.28,23.43 53.62,23.77 Q5.3 | 53.18,22.31 R14.2 | R14.2 53.28,22.16 52.7,21.59 52.7,18.9
  Top 0.61: R_L293DD.2 52.7,18.9 R_L293DD.19
N$8  (via drill 0.35)
  Top 0.406: R7.1 60.11,26.04 60.96,26.04 61.59,25.4 61.59,22.86 62.86,21.59 64.14,21.59 64.77,20.96 v64.77,20.17 | 61.59,20.14 61.62,20.12 61.67,20.17 62.86,20.17
  Top 0.61: L_L293DD.1 62.86,20.17 v64.77,20.17 | L_L293DD.11 v64.77,8.74 | R7.1 59.69,28.16 Q4.3
  Bottom 0.61: v64.77,20.17 v64.77,8.74
N$9  (via drill 0.35)
  Top 0.406: Q6.3 46,22.44 R12.1 46.04,20.18 46.05,20.17
  Top 0.61: R_L293DD.1 46.05,20.17 v51.33,20.17 | R_L293DD.11 v52.43,8.74
  Bottom 0.61: v51.33,20.17 52.43,19.07 v52.43,8.74
N$10
  Top 0.406: R1.2 64.35,28.78 64.35,28.51
  Top 0.61: 64.35,28.51 Q2.1
N$11
  Top 0.406: R2.2 60.54,31.68
  Top 0.61: Q4.1 60.54,31.68
N$12
  Top 0.406: R9.2 68.26,30.38 68.26,28.63
  Top 0.61: 68.26,28.63 Q7.1
N$13
  Top 0.61: Q5.1 54.57,28.86 R5.2
N$14
  Top 0.61: R6.2 46.85,27.16 Q6.1
N$15
  Top 0.61: Q8.1 49.01,28.88 R13.2
N$16  (via drill 0.35)
  Top 0.813: L_L293DD.13 v70.03,11.28
  Bottom 0.813: MOTOR_L_F.P1 73.47,6.54 70.03,9.98 v70.03,11.28
N$17  (via drill 0.35)
  Top 0.813: L_L293DD.8 v66.27,11.28
  Bottom 0.813: v66.27,11.28 66.27,8.48 64.48,6.69 MOTOR_L_B.P2
N$18  (via drill 0.35)
  Top 0.61: 67.54,17.63 v67.56,17.65
  Top 0.813: L_L293DD.3 67.54,17.63
  Bottom 0.813: v67.56,17.65 67.56,7.87 66.48,6.79 MOTOR_L_B.P1
N$19
  Top 0.61: Q9.1 78.7,4.17 R18.2
N$20
  Top 0.61: Q9.2 79.63,9.32 79.63,17.14 78.64,18.14 R3.1
N$21
  Top 0.61: FRONTLIGHT.P1 77.42,15.92 76.75,16.6 R3.2
N$22
  Top 0.406: PCA9533.3 14.62,31.63 14.38,31.39 12.93,31.39 11.94,32.38 11.94,33.36 R26.1
  Top 0.508: 10.38,34.73 R26.1
N$23
  Top 0.406: R27.1 10.49,32.72 12.47,30.73 15.09,30.73 15.88,31.53 PCA9533.2
N$24
  Top 0.406: R28.1 10.73,30.12 16.15,30.12 17.15,31.12 PCA9533.1
  Top 0.508: 10.59,30.48 R28.1
N$25  (via drill 0.35)
  Top 0.813: R_L293DD.8 v47.65,11.28
  Bottom 0.813: v47.65,11.28 46.06,9.69 MOTOR_R_B.P2
N$26  (via drill 0.35)
  Top 0.813: R_L293DD.3 v48.74,17.63
  Bottom 0.813: MOTOR_R_B.P1 48.06,7.12 48.74,7.8 v48.74,17.63
N$31
  Top 0.406: RGB_LED.P4 8.52,34.77 R26.2
N$33
  Top 0.406: RGB_LED.P3 8.62,32.77 R27.2
  Top 0.508: 8.54,32.84 R27.2
N$34
  Top 0.305: MPU6050.20 47.62,32.5 47.74,32.5 49.49,32.5 C17.1
N$35
  Top 0.406: RGB_LED.P2 6.06,30.77 6.35,30.48 R28.2
N$36
  Top 0.305: C21.1 41.66,33 MPU6050.10
N$37
  Top 0.508: IRLML2502.3 13.06,41.4 14.95,41.4 R22.2
N$38
  Top 0.813: R38.2 69.15,35.88 IRLML1.3
N$39
  Top 0.813: LIDAR_MOTOR.P2 77.44,39.06 D1.A 75.61,33.02 72.39,33.02 71.2,34.21 IRLML1.1
N$46
  Top 0.305: STM32F103CB.6 24.06,21.59
  Top 0.406: C36.2 24.06,21.59
  Top 0.508: KX-9A.1 23.96,21.13 C36.2
N$47
  Top 0.305: 24.93,32.55 C37.2 25.45,32.38 25.45,31.06 26.39,30.12 26.39,23.14 27.44,22.09 STM32F103CB.5
  Top 0.508: KX-9A.3 21.76,30.65 23.5,32.38 25.45,32.38
N$49
  Top 0.305: STM32F103CB.2 27.57,23.59 27.1,24.05 27.1,25.59 R30.1
N$55
  Top 1.016: IRLML2502.1 9.58,42.42 D3.A 9.53,42.36 8.73,41.56 FAN.P2
NRST  (via drill 0.35)
  Top 0.305: STM32F103CB.7 26.62,21.09 v26.24,20.7
  Bottom 0.305: PI_ZERO.26 34.9,40.36 34.9,38.3 34.06,37.47 29.85,37.47 27.94,35.56 27.94,22.4 v26.24,20.7
PWM_FAN  (via drill 0.35)
  Top 0.305: STM32F103CB.18 v32.82,15.19
  Top 0.406: v18.42,23.5 18.42,32.44 17.93,32.92 17.93,36.88 15.65,39.17 R22.1
  Bottom 0.406: v32.82,15.19 arc-90 32.03,14.4 23.7,14.4 19.69,18.41 19.69,20.96 18.42,22.23 v18.42,23.5
PWM_LIDAR  (via drill 0.35)
  Top 0.305: STM32F103CB.19 33.32,18.08 33.66,18.41 v34.29,18.41
  Top 0.406: R38.1 67.31,34.2 | 67.22,34.29 67.31,34.2 | 67.31,34.2 v67.31,32.38
  Bottom 0.406: v34.29,18.41 34.92,19.05 34.92,22.71 38.25,26.04 43.81,26.04 45.19,27.41 48.36,27.41 49.71,28.75 56.06,28.75 57.78,30.48 66.68,30.48 67.31,31.12 v67.31,32.38
PWM_M_EN_1  (via drill 0.35)
  Top 0.305: STM32F103CB.16 31.82,19.32 v31.83,19.79
  Top 0.406: R2.1 58.2,33.02 57.15,33.02 v55.88,31.75
  Bottom 0.406: v31.83,19.79 31.83,20.04 31.83,21.98 37.59,27.74 41.83,27.74 42.62,28.52 47.9,28.52 50.34,30.96 55.09,30.96 v55.88,31.75
PWM_M_EN_2  (via drill 0.35)
  Top 0.305: v33.98,19.56 33.2,19.56 32.32,18.68 STM32F103CB.17
  Top 0.406: v43.38,27.18 45.15,28.94 R6.1
  Bottom 0.406: v33.98,19.56 33.98,22.55 38.05,26.62 42.82,26.62 v43.38,27.18
SCL  (via drill 0.35)
  Top 0.305: STM32F103CB.42 33.32,26.69 v33.88,27.25 33.88,27.94 32.38,29.44 v32.38,30.48 | MPU6050.23 48.3,34 49.43,35.13 v49.43,36.73 | 20.1,16.48 22.11,16.48 R29.2
  Top 0.406: INA219.5 11.13,26.97 11.73,26.37 11.73,24.18 13,22.91 14.83,22.91 19.69,18.06 19.69,16.9 20.1,16.48 | v22.96,18.9 R29.2
  Top 0.508: v22.96,18.9 22.43,19.43 20.42,19.43 14.85,25.01 14.61,25.25 PCA9533.6
  Bottom 0.305: v32.38,30.48 SCL.TP
  Bottom 0.406: 23.01,18.9 v22.96,18.9 22.96,17.68 25.4,15.24 27.94,15.24 29.85,17.14 29.85,21.58 33.88,25.62 v33.88,27.25 37.46,30.84 37.46,34.92 39.27,36.73 v49.43,36.73
SDA  (via drill 0.35)
  Top 0.305: STM32F103CB.43 v32.82,27.6 v32.82,27.61 | MPU6050.24 47.83,34.5 48.46,35.13 v48.46,37.49
  Top 0.406: R20.2 v20.8,18.57 20.07,18.57 15.14,23.5 13.33,23.5 12.37,24.46 12.37,28.32 | PCA9533.7 15.88,28.04 15.6,28.32 12.37,28.32 | 12.37,28.32 11.99,28.7 10.77,28.7 10.48,28.42 INA219.6
  Bottom 0.406: 35.63,30.41 v32.82,27.61 32.82,25.34 29.26,21.78 29.26,17.53 27.61,15.88 25.78,15.88 24.13,17.53 24.13,18.97 23.41,19.69 21.92,19.69 v20.8,18.57 | 35.63,30.41 36.52,31.31 36.52,35.26 38.76,37.49 v48.46,37.49 | SDA.TP 35.63,30.41
SWCLK
  Top 0.305: STM32F103CB.37 35.82,26.79 33.88,28.73 33.88,36.27 35.08,37.47 36.2,37.47 37.46,38.73 37.46,42.14 38.51,43.18 42.39,43.18 PI_ZERO.20
SWDIO
  Top 0.305: 34.57,35.84 34.54,35.84 | 34.54,35.84 34.54,28.96 36.58,26.92 36.58,25.21 36.35,24.98 36.16,24.8 35.94,24.57 35.94,23.55 36.4,23.09 STM32F103CB.34 | 34.54,35.84 35.51,36.8 38.71,36.8 40.08,38.18 40.08,40.41 PI_ZERO.24
TEMPERATURE  (via drill 0.35)
  Top 0.305: STM32F103CB.28 v39.41,20.09 v39.42,20.09 40.68,18.83 R25.1
  Top 0.406: U5.1 57.6,10.78 v57.61,10.77
  Bottom 0.406: v39.42,20.09 40.77,18.75 46.2,18.75 49.61,22.15 49.76,22.3 49.84,22.38 52.93,22.38 57.61,17.7 v57.61,10.77
U1_RX  (via drill 0.35)
  Top 0.305: STM32F103CB.31 40,21.59 v40.64,22.23
  Bottom 0.406: LDIAR.P1 73.95,30.04 68.96,25.04 48.54,25.04 45.72,22.23 v40.64,22.23
U1_TX  (via drill 0.35)
  Top 0.305: STM32F103CB.30 41.94,21.09 v41.96,21.11
  Bottom 0.406: LDIAR.P2 72.87,28.04 69.22,24.38 48.87,24.38 45.59,21.11 v41.96,21.11
USART2_RX  (via drill 0.35)
  Top 0.305: STM32F103CB.13 30.32,15.84 30.12,15.65 29.06,15.65 v27.03,17.65
  Bottom 0.305: PI_ZERO.34 26.09,41.33 24.77,40.01 24.77,38.73 26.67,36.83 26.67,23.72 24.74,21.79 24.74,19.96 v27.03,17.65
USART2_TX  (via drill 0.35)
  Top 0.305: STM32F103CB.12 v27.24,18.59 v27.23,18.59
  Bottom 0.305: PI_ZERO.32 27.33,40.41 27.33,23.51 25.4,21.58 25.4,20.32 27.13,18.59 v27.23,18.59
V+
  Top 0.406: 10.79,3.68 10.49,3.99 10.49,18.72 9.19,20.03 INA219.1
  Top 0.61: R34.2 2.49,19.05 2.5,19.05 PWR.1
  Top 2.54: 8.87,3.66 C16.1 | C16.1 10.79,3.68 R17.2 13.48,3.68 13.49,3.68 | C16.1 5.1,3.68 C27.+ 3.33,3.66 2.29,4.7 2.29,12.41 PWR.1
(copper drawn outside any net)
  shapes: Top area x4

## Text on the board
tNames: + | - + | -
bNames: ζ2 Motherboard